# Altium PCB AICat V1.7 双面板 板厚1.6mm_lrd.PcbDoc (part 4 of 6)
Units mm, origin at the board's own origin, x right, y up, seen from the top; angles counter-clockwise.
Board outline 63.83 x 43.59 mm, 2 copper layers (Top Layer, Bottom Layer); 123 components, 84 nets, 332 pads, 255 vias.
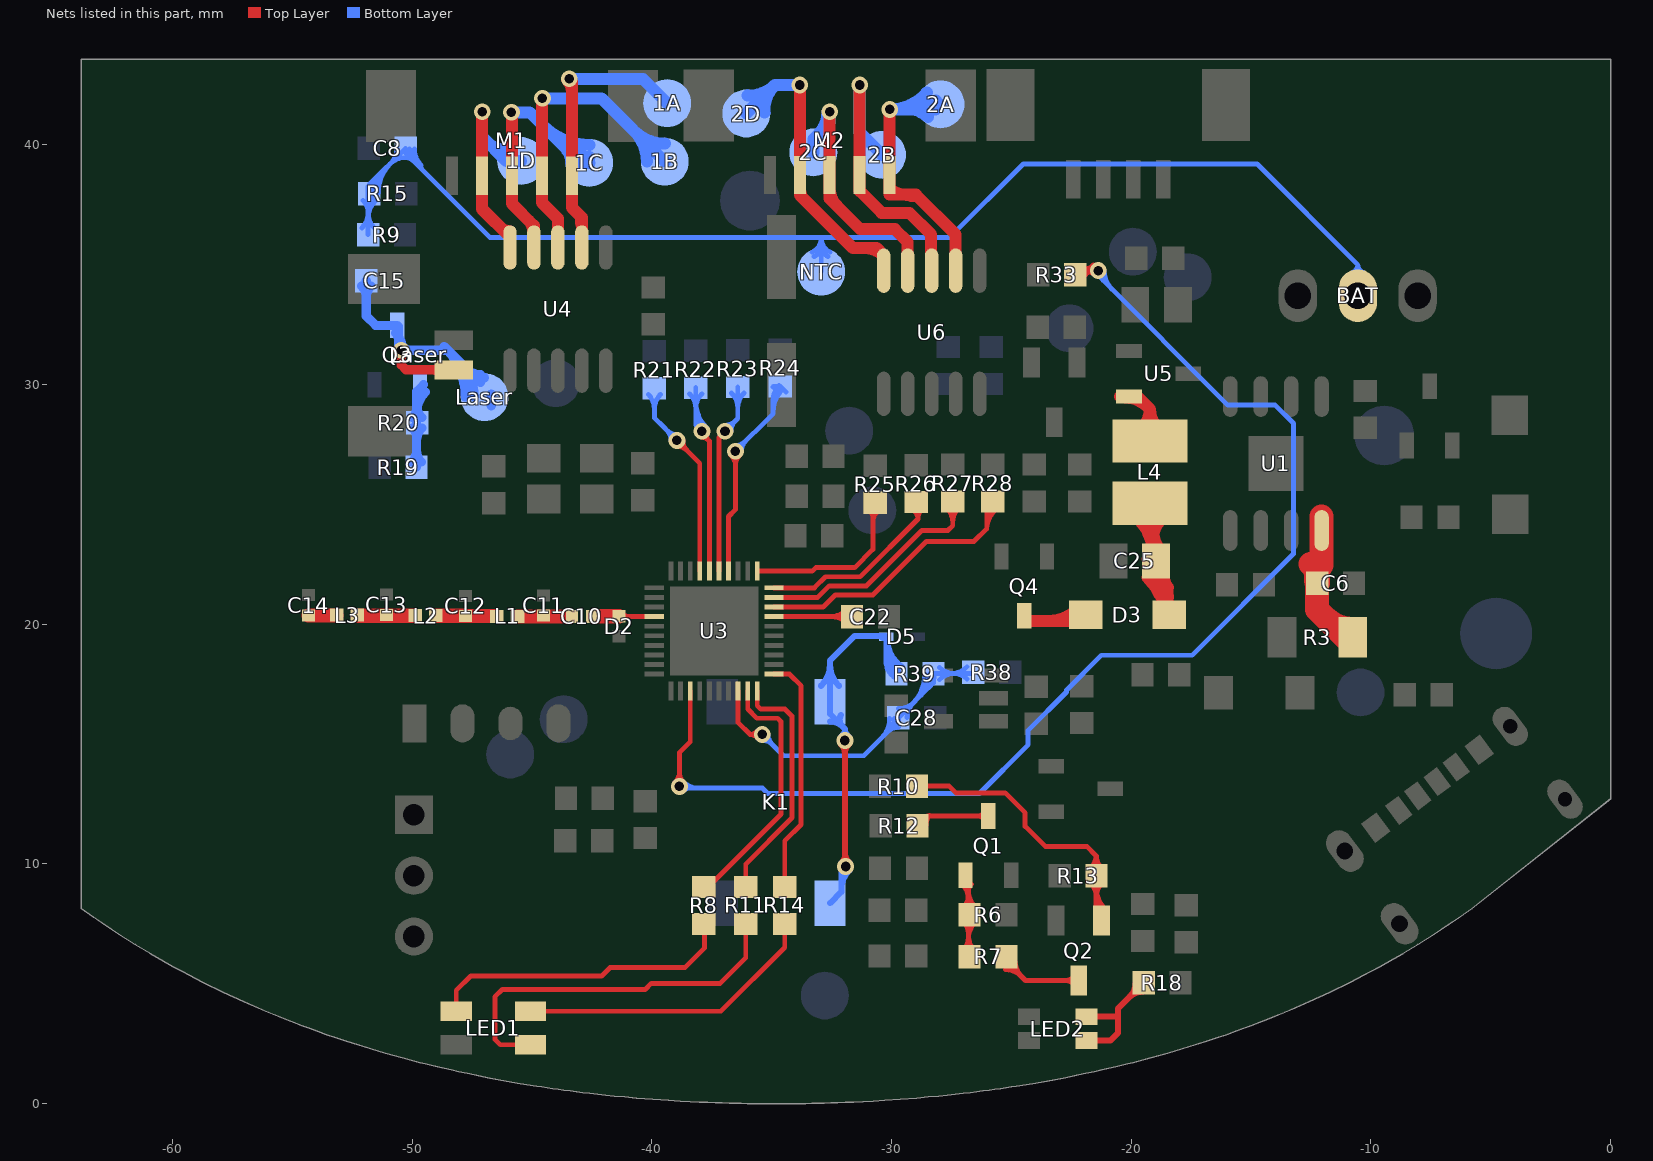
[diagram p4: the nets of this part, all layers, seen from the top]

## Via types
v1: diameter 0.7, hole 0.4, Top Layer to Bottom Layer, tented both sides, 255 vias

## Nets (pads, with @x,y where several pads share a name; then routed paths per layer and width w, separated by ;. In a path a pad name is that pad's centre, name@x,y a point inside that pad or via, vN(x,y) a via of type N, cw(c..) or ccw(c..) an arc to the next point about the centre after c; other vN are vias at no path point) (continued)
KEY: C28.2 R38.1 R39.2 U3.8 | length 42.4
  Top Layer w0.203: U3.8@-36.403,17.214 -36.403,15.893 -35.908,15.398 ; v1(-35.4,15.398) -35.908,15.398 ; -35.908,15.398 cw(c-35.908,15.003) v1@-35.596,15.245 ; -35.908,15.398 ccw(c-35.908,15.793) v1@-35.596,15.55 ; -35.908,15.398 ccw(c-35.908,15.793) v1@-35.596,15.55 ; -35.908,15.398 cw(c-35.908,15.003) v1@-35.596,15.245 ; -35.908,15.398 ccw(c-35.908,15.793) v1@-35.596,15.55 ; -35.908,15.398 cw(c-35.908,15.003) v1@-35.596,15.245
  Bottom Layer w0.203: v1(-35.4,15.398) -34.511,14.509 -31.159,14.509 -29.719,15.949 C28.2@-29.719,16.084 -28.255,17.548 R39.2@-28.255,17.938 -26.645,17.938 R38.1@-26.595,17.989 ; -30.417,15.251 ccw(c-31.225,16.059) C28.2@-30.082,16.059 ; -30.151,15.516 cw(c-29.719,15.084) C28.2@-29.719,15.695 ; C28.2@-30.07,15.598 ccw(c-30.531,16.059) C28.2@-29.879,16.059 ; v1@-35.4,15.15 cw(c-35.4,14.55) -34.976,14.974 ; v1@-35.4,15.15 cw(c-35.4,14.55) -34.976,14.974 ; v1@-35.4,15.15 cw(c-35.4,14.55) -34.976,14.974 ; v1@-35.152,15.398 ccw(c-34.552,15.398) -34.976,14.974 ; v1@-35.152,15.398 ccw(c-34.552,15.398) -34.976,14.974 ; v1@-35.152,15.398 ccw(c-34.552,15.398) -34.976,14.974 ; C28.2@-29.719,16.472 ccw(c-29.719,17.41) -29.056,16.747 ; C28.2@-29.719,16.472 ccw(c-29.719,17.41) -29.056,16.747 ; C28.2@-29.719,16.472 ccw(c-29.719,17.41) -29.056,16.747 ; C28.2@-29.355,16.109 cw(c-28.538,16.109) -29.116,16.686 ; C28.2@-29.355,16.109 cw(c-28.538,16.109) -29.116,16.686 ; C28.2@-29.355,16.109 cw(c-28.538,16.109) -29.116,16.686 ; -29.134,16.669 ccw(c-30.378,17.913) R39.2@-28.618,17.913 ; -29.134,16.669 ccw(c-30.378,17.913) R39.2@-28.618,17.913 ; -29.134,16.669 ccw(c-30.378,17.913) R39.2@-28.618,17.913 ; -28.787,17.016 ccw(c-29.684,17.913) R39.2@-28.415,17.913 ; -28.787,17.016 ccw(c-29.684,17.913) R39.2@-28.415,17.913 ; -28.787,17.016 ccw(c-29.684,17.913) R39.2@-28.415,17.913 ; -28.44,17.363 ccw(c-28.99,17.913) R39.2@-28.212,17.913 ; -28.44,17.363 ccw(c-28.99,17.913) R39.2@-28.212,17.913 ; -28.44,17.363 ccw(c-28.99,17.913) R39.2@-28.212,17.913 ; R39.2@-27.998,17.681 cw(c-27.378,17.061) -27.378,17.938 ; R39.2@-27.998,17.681 cw(c-27.378,17.061) -27.378,17.938 ; R39.2@-27.998,17.681 cw(c-27.378,17.061) -27.378,17.938 ; R39.2@-27.998,18.195 ccw(c-27.378,18.815) -27.378,17.938 ; R39.2@-27.998,18.195 ccw(c-27.378,18.815) -27.378,17.938 ; R39.2@-27.998,18.195 ccw(c-27.378,18.815) -27.378,17.938 ; -27.534,17.938 ccw(c-27.534,18.903) R38.1@-26.852,18.221 ; -27.534,17.938 ccw(c-27.534,18.903) R38.1@-26.852,18.221 ; -27.534,17.938 ccw(c-27.534,18.903) R38.1@-26.852,18.221 ; -27.41,17.938 cw(c-27.41,17.149) R38.1@-26.852,17.707 ; -27.41,17.938 cw(c-27.41,17.149) R38.1@-26.852,17.707 ; -27.41,17.938 cw(c-27.41,17.149) R38.1@-26.852,17.707 ; -30.176,15.492 cw(c-29.832,15.492) -29.999,15.792 ccw(c-29.832,15.492) -30.176,15.492
LED_B: R8.2 U3.9 | length 10.7
  Top Layer w0.203: R8.2@-37.839,9.031 -37.653,9.031 -34.613,12.071 -34.613,15.931 -34.754,16.072 -35.618,16.072 -36.003,16.458 U3.9@-36.003,17.214
LED_G: R11.2 U3.10 | length 10.1
  Top Layer w0.203: R11.2@-36.086,9.081 -36.086,9.988 -34.156,11.918 -34.156,16.16 -34.449,16.453 -35.46,16.453 -35.603,16.597 U3.10@-35.603,17.214
LED_R: R14.2 U3.11 | length 10
  Top Layer w0.203: U3.11@-34.904,17.914 -34.258,17.914 -33.775,17.43 -33.775,11.639 -34.461,10.953 R14.2@-34.461,9.081
LEIDA_CON: R33.2 U3.3 | length 77.5
  Top Layer w0.203: v1(-38.855,13.23) -38.855,14.636 -38.403,15.088 U3.3@-38.403,17.214 ; R33.2@-22.692,34.778 -22.667,34.804 v1@-21.405,34.804 ; R33.2@-22.102,34.804 cw(c-22.102,34.03) v1@-21.555,34.577 ; -21.857,34.804 ccw(c-21.857,35.23) v1@-21.555,34.928 ; v1@-21.456,34.753 v1@-21.405,34.804 ; v1@-39.03,13.405 ccw(c-39.455,13.829) -38.855,13.829 ; v1@-39.03,13.405 ccw(c-39.455,13.829) -38.855,13.829 ; v1@-39.03,13.405 ccw(c-39.455,13.829) -38.855,13.829 ; -38.855,13.829 ccw(c-38.255,13.829) v1@-38.679,13.405 ; -38.855,13.829 ccw(c-38.255,13.829) v1@-38.679,13.405 ; -38.855,13.829 ccw(c-38.255,13.829) v1@-38.679,13.405 ; R33.2@-22.439,34.502 cw(c-21.821,34.02) -21.821,34.804 ; R33.2@-22.439,34.502 cw(c-21.821,34.02) -21.821,34.804 ; R33.2@-22.439,34.502 cw(c-21.821,34.02) -21.821,34.804 ; R33.2@-22.279,34.377 cw(c-21.405,33.696) v1@-21.405,34.804 ; R33.2@-22.279,34.377 cw(c-21.405,33.696) v1@-21.405,34.804 ; R33.2@-22.279,34.377 cw(c-21.405,33.696) v1@-21.405,34.804 ; R33.2@-22.005,34.804 cw(c-22.005,34.204) v1@-21.581,34.628 ; R33.2@-22.005,34.804 ccw(c-22.005,35.403) v1@-21.581,34.979 ; R33.2@-22.005,34.804 cw(c-22.005,34.204) v1@-21.581,34.628 ; R33.2@-22.005,34.804 ccw(c-22.005,35.403) v1@-21.581,34.979 ; R33.2@-22.005,34.804 ccw(c-22.005,35.403) v1@-21.581,34.979 ; R33.2@-22.005,34.804 cw(c-22.005,34.204) v1@-21.581,34.628 ; R33.2@-22.005,34.804 ccw(c-22.005,35.403) v1@-21.581,34.979 ; R33.2@-22.005,34.804 cw(c-22.005,34.204) v1@-21.581,34.628 ; v1@-21.405,34.804 ccw(c-21.405,34.118) -22.014,34.433 cw(c-21.405,34.118) v1@-21.405,34.804 ; R33.2@-22.195,34.526 cw(c-21.739,34.291) -21.739,34.804 ccw(c-21.739,34.291) R33.2@-22.195,34.526
  Bottom Layer w0.203: v1(-38.855,13.23) -38.788,13.163 -35.392,13.163 -35.164,12.934 -26.333,12.934 -24.301,14.966 -24.301,15.568 -22.7,17.169 -22.7,17.245 -21.245,18.7 -17.46,18.7 -13.232,22.928 -13.232,28.377 -13.994,29.139 -15.969,29.139 -21.405,34.575 -21.405,34.804 v1@-21.456,34.753 ; v1@-21.334,34.753 ccw(c-20.735,34.753) -21.159,34.329 ; v1@-21.131,34.753 ccw(c-20.041,34.753) -20.812,33.982 ; v1@-38.679,13.054 cw(c-38.416,12.791) -38.416,13.163 ; v1@-38.679,13.054 cw(c-38.416,12.791) -38.416,13.163 ; v1@-38.679,13.054 cw(c-38.416,12.791) -38.416,13.163 ; v1@-38.679,13.405 ccw(c-38.094,13.991) -38.094,13.163 ; v1@-38.679,13.405 ccw(c-38.094,13.991) -38.094,13.163 ; v1@-38.679,13.405 ccw(c-38.094,13.991) -38.094,13.163 ; v1@-21.36,34.804 ccw(c-20.699,34.804) -21.166,34.336 ; v1@-21.36,34.804 ccw(c-20.699,34.804) -21.166,34.336 ; v1@-21.36,34.804 ccw(c-20.699,34.804) -21.166,34.336 ; v1@-21.36,34.804 ccw(c-20.699,34.804) -21.166,34.336 ; v1@-21.157,34.804 ccw(c-20.005,34.804) -20.819,33.989 ; v1@-21.157,34.804 ccw(c-20.005,34.804) -20.819,33.989 ; v1@-21.157,34.804 ccw(c-20.005,34.804) -20.819,33.989 ; v1@-21.157,34.804 ccw(c-20.005,34.804) -20.819,33.989
  other v1: -21.38,34.753
MOTORA_INA: R21.2 U3.27 | length 22.7
  Top Layer w0.203: v1(-38.956,27.666) -38.003,26.713 -38.003,22.789 ; U3.27@-38.003,22.213 -38.003,22.789 ; -38.003,23.158 -38.003,22.789 ; v1@-38.956,27.418 cw(c-38.956,26.818) -38.532,27.242 ; v1@-38.956,27.418 cw(c-38.956,26.818) -38.532,27.242 ; v1@-38.956,27.418 cw(c-38.956,26.818) -38.532,27.242 ; v1@-38.956,27.418 cw(c-38.956,26.818) -38.532,27.242 ; v1@-38.956,27.418 cw(c-38.956,26.818) -38.532,27.242 ; v1@-38.708,27.666 ccw(c-38.108,27.666) -38.532,27.242 ; v1@-38.708,27.666 ccw(c-38.108,27.666) -38.532,27.242 ; v1@-38.708,27.666 ccw(c-38.108,27.666) -38.532,27.242 ; v1@-38.708,27.666 ccw(c-38.108,27.666) -38.532,27.242 ; v1@-38.708,27.666 ccw(c-38.108,27.666) -38.532,27.242
  Bottom Layer w0.203: v1@-39.204,27.682 ccw(c-39.689,27.712) -39.346,28.055 ; v1@-38.972,27.914 cw(c-39.002,28.398) -39.346,28.055 ; v1(-38.956,27.666) -39.346,28.055 ; R21.2@-40.153,29.586 cw(c-40.774,28.965) -39.896,28.965 ; R21.2@-40.153,29.586 cw(c-40.774,28.965) -39.896,28.965 ; R21.2@-40.153,29.586 cw(c-40.774,28.965) -39.896,28.965 ; R21.2@-40.153,29.586 cw(c-40.774,28.965) -39.896,28.965 ; -39.896,28.965 cw(c-39.019,28.965) R21.2@-39.639,29.586 ; -39.896,28.965 cw(c-39.019,28.965) R21.2@-39.639,29.586 ; -39.896,28.965 cw(c-39.019,28.965) R21.2@-39.639,29.586 ; -39.896,28.965 cw(c-39.019,28.965) R21.2@-39.639,29.586 ; -39.896,28.965 -39.896,28.606 -39.515,28.225 -39.346,28.055 ; -39.38,28.09 cw(c-39.805,27.666) v1@-39.205,27.666 ; -39.38,28.09 ccw(c-38.956,28.514) v1@-38.956,27.915 ; -39.38,28.09 cw(c-39.805,27.666) v1@-39.205,27.666 ; -39.38,28.09 ccw(c-38.956,28.514) v1@-38.956,27.915 ; -39.38,28.09 ccw(c-38.956,28.514) v1@-38.956,27.915 ; -39.38,28.09 cw(c-39.805,27.666) v1@-39.205,27.666 ; -39.38,28.09 ccw(c-38.956,28.514) v1@-38.956,27.915 ; -39.38,28.09 cw(c-39.805,27.666) v1@-39.205,27.666
MOTORA_INB: R22.2 U3.26 | length 18.9
  Top Layer w0.203: v1@-38.017,28.047 -37.603,27.634 U3.26@-37.603,22.213 ; v1@-37.915,27.799 cw(c-37.915,27.444) -37.664,27.695 ; v1@-37.915,27.799 cw(c-37.915,27.444) -37.664,27.695 ; v1@-37.915,27.799 cw(c-37.915,27.444) -37.664,27.695 ; v1@-37.915,27.799 cw(c-37.915,27.444) -37.664,27.695 ; v1@-37.694,27.935 ccw(c-37.502,27.837) -37.654,27.685 ; v1@-37.694,27.935 ccw(c-37.502,27.837) -37.654,27.685 ; v1@-37.694,27.935 ccw(c-37.502,27.837) -37.654,27.685 ; v1@-37.694,27.935 ccw(c-37.502,27.837) -37.654,27.685
  Bottom Layer w0.203: -38.169,28.77 ccw(c-37.193,28.77) v1@-37.883,28.079 ; -38.169,29.26 ccw(c-36.702,29.26) v1@-37.739,28.223 ; R22.2@-38.169,29.868 -38.169,28.301 v1(-37.915,28.047) ; R22.2@-38.426,29.611 cw(c-39.046,28.991) -38.169,28.991 ; R22.2@-38.426,29.611 cw(c-39.046,28.991) -38.169,28.991 ; R22.2@-38.426,29.611 cw(c-39.046,28.991) -38.169,28.991 ; R22.2@-38.426,29.611 cw(c-39.046,28.991) -38.169,28.991 ; R22.2@-38.426,29.611 cw(c-39.046,28.991) -38.169,28.991 ; -38.169,28.991 cw(c-37.292,28.991) R22.2@-37.912,29.611 ; -38.169,28.991 cw(c-37.292,28.991) R22.2@-37.912,29.611 ; -38.169,28.991 cw(c-37.292,28.991) R22.2@-37.912,29.611 ; -38.169,28.991 cw(c-37.292,28.991) R22.2@-37.912,29.611 ; -38.169,28.991 cw(c-37.292,28.991) R22.2@-37.912,29.611
MOTORA_INC: R23.2 U3.25 | length 14.9
  Top Layer w0.203: U3.25@-37.203,22.213 -37.203,26.955 ; -37.203,27.26 -37.203,26.955 ; v1(-36.95,28.047) -37.203,27.794 -37.203,26.955
  Bottom Layer w0.203: v1(-36.95,28.047) -36.416,28.581 R23.2@-36.416,29.893 ; v1@-36.95,28.296 ccw(c-36.95,28.895) -36.526,28.471 ccw(c-36.102,28.047) v1@-36.701,28.047 ; R23.2@-36.673,29.636 cw(c-37.294,29.016) -36.416,29.016 cw(c-35.539,29.016) R23.2@-36.159,29.636 ; R23.2@-36.643,29.609 cw(c-37.017,29.139) -36.416,29.139 ; R23.2@-36.643,29.609 cw(c-37.017,29.139) -36.416,29.139 ; R23.2@-36.643,29.609 cw(c-37.017,29.139) -36.416,29.139 ; R23.2@-36.643,29.609 cw(c-37.017,29.139) -36.416,29.139 ; -36.416,29.139 cw(c-35.816,29.139) R23.2@-36.19,29.609 ; -36.416,29.139 cw(c-35.816,29.139) R23.2@-36.19,29.609 ; -36.416,29.139 cw(c-35.816,29.139) R23.2@-36.19,29.609 ; -36.416,29.139 cw(c-35.816,29.139) R23.2@-36.19,29.609
MOTORA_IND: R24.2 U3.24 | length 14
  Top Layer w0.203: U3.24@-36.803,22.213 -36.803,24.491 -36.518,24.776 -36.518,25.812 ; -36.518,26.295 -36.518,25.812 ; v1(-36.518,27.209) -36.518,25.812 ; -36.518,26.609 ccw(c-37.118,26.609) -36.694,27.033 cw(c-37.118,26.609) -36.518,26.609 ; -36.518,26.609 cw(c-35.918,26.609) -36.342,27.033 ccw(c-35.918,26.609) -36.518,26.609
  Bottom Layer w0.203: v1@-36.518,27.457 ccw(c-36.518,28.057) -36.094,27.633 ccw(c-35.67,27.209) v1@-36.27,27.209 ; -36.213,27.514 v1(-36.518,27.209) -34.943,28.784 -34.943,29.347 cw(c-34.092,29.347) R24.2@-34.694,29.949 ; -34.943,28.856 cw(c-33.601,28.856) R24.2@-34.55,29.805 ; R24.2@-34.943,29.901 -34.926,29.919 R24.2@-34.638,29.919 R24.2@-34.41,29.69
MOTORA_OUTA: 1A.1 M1.1 U4.7 | length 14.2
  Top Layer w0.381: U4.7@-43.02,35.812 U4.7@-42.923,35.715 ; -43.02,36.813 ccw(c-42.473,36.813) U4.7@-42.86,36.426 ; -43.02,36.813 ccw(c-42.473,36.813) U4.7@-42.86,36.426 ; -43.02,36.813 ccw(c-42.473,36.813) U4.7@-42.86,36.426
  Top Layer w0.5: v1(-43.452,42.754) -43.34,42.641 M1.1@-43.34,38.713 -43.34,37.384 -42.923,36.967 U4.7@-42.923,35.715 ; v1@-43.523,42.683 cw(c-43.965,42.241) -43.34,42.241 ccw(c-43.965,42.241) v1@-43.523,42.683
  Bottom Layer w0.5: v1(-43.452,42.754) -40.379,42.754 1A.1@-39.363,41.738
MOTORA_OUTB: 1B.1 M1.2 U4.8 | length 18.4
  Top Layer w0.5: v1@-44.59,41.916 M1.2@-44.59,38.713 -44.59,37.592 -43.923,36.926 U4.8@-43.923,35.715
  Bottom Layer w0.381: v1@-44.57,41.916 -44.595,41.916 v1(-44.57,41.941)
  Bottom Layer w0.5: v1(-44.57,41.941) -42.106,41.941 1B.1@-39.464,39.299 ; -40.745,40.58 ccw(c-39.464,41.86) -39.464,40.049 cw(c-39.464,41.86) -40.745,40.58 ; -40.745,40.58 cw(c-42.025,39.299) -40.214,39.299 ccw(c-42.025,39.299) -40.745,40.58
MOTORA_OUTC: 1C.1 M1.3 U4.9 | length 21.4
  Top Layer w0.381: -45.265,36.972 cw(c-45.876,36.362) U4.9@-45.013,36.362 ; -45.265,36.972 cw(c-45.876,36.362) U4.9@-45.013,36.362 ; -45.265,36.972 cw(c-45.876,36.362) U4.9@-45.013,36.362
  Top Layer w0.5: v1@-45.84,41.357 M1.3@-45.84,38.713 -45.84,37.547 -44.923,36.63 U4.9@-44.923,35.715 ; -45.164,36.871 cw(c-45.672,36.362) -44.953,36.362 ccw(c-45.672,36.362) -45.164,36.871
  Bottom Layer w0.381: v1(-45.865,41.357) v1@-45.682,41.357
  Bottom Layer w0.5: v1@-45.682,41.357 -45.103,41.357 -42.995,39.249 1C.1@-42.614,39.249 ; -44.545,40.798 ccw(c-42.614,42.729) -42.614,39.999 cw(c-42.614,42.729) -44.545,40.798 ; -43.691,39.945 ccw(c-42.614,41.022) -42.614,39.499 cw(c-42.614,41.022) -43.691,39.945 ; -43.625,39.878 cw(c-44.255,39.249) -43.364,39.249 ccw(c-44.255,39.249) -43.625,39.878
MOTORA_OUTD: 1D.1 M1.4 U4.10 | length 15.9
  Top Layer w0.203: -47.166,37.806 M1.4@-47.166,38.535 ; -47.166,37.798 cw(c-46.906,37.798) M1.4@-47.023,38.031 ; -47.166,37.798 cw(c-46.906,37.798) M1.4@-47.023,38.031 ; -47.166,37.798 cw(c-46.906,37.798) M1.4@-47.023,38.031 ; -47.166,37.798 cw(c-46.906,37.798) M1.4@-47.023,38.031 ; -47.166,37.798 cw(c-46.906,37.798) M1.4@-47.023,38.031
  Top Layer w0.381: -46.427,36.66 ccw(c-45.923,37.164) U4.10@-45.923,36.452 ; -46.427,36.66 ccw(c-45.923,37.164) U4.10@-45.923,36.452 ; -46.427,36.66 ccw(c-45.923,37.164) U4.10@-45.923,36.452
  Top Layer w0.5: v1@-47.09,41.382 M1.4@-47.09,38.713 -47.09,37.324 -45.923,36.157 U4.10@-45.923,35.715 ; -46.325,36.559 ccw(c-45.923,36.96) -45.923,36.392 cw(c-45.923,36.96) -46.325,36.559
  Bottom Layer w0.5: v1(-47.084,41.382) -47.084,40.341 -46.068,39.325 1D.1@-45.459,39.325 ; -46.78,40.036 ccw(c-46.274,40.541) -45.876,39.948 cw(c-46.274,40.541) -46.78,40.036
MOTORB_INA: R25.2 U3.21 | length 12.6
  Top Layer w0.203: U3.21@-35.603,22.213 -33.31,22.213 -33.165,22.358 -31.54,22.358 -30.778,23.12 -30.778,24.259 ; -30.779,24.261 -30.778,24.263 -30.778,24.966 R25.2@-30.676,25.067 ; R25.2@-30.958,24.81 cw(c-31.393,24.375) -30.778,24.375 ; R25.2@-30.958,24.81 cw(c-31.393,24.375) -30.778,24.375 ; R25.2@-30.958,24.81 cw(c-31.393,24.375) -30.778,24.375 ; R25.2@-30.958,24.81 cw(c-31.393,24.375) -30.778,24.375 ; R25.2@-30.958,24.81 cw(c-31.393,24.375) -30.778,24.375 ; -30.778,24.259 cw(c-30.178,24.259) R25.2@-30.504,24.762 ; -30.778,24.259 cw(c-30.178,24.259) R25.2@-30.504,24.762 ; -30.778,24.259 cw(c-30.178,24.259) R25.2@-30.504,24.762 ; -30.778,24.259 cw(c-30.178,24.259) R25.2@-30.504,24.762 ; -30.778,24.259 cw(c-30.178,24.259) R25.2@-30.504,24.762
MOTORB_INB: R26.2 U3.20 | length 12.7
  Top Layer w0.203: U3.20@-34.904,21.514 -34.085,21.514 -33.222,21.514 -32.759,21.977 -31.311,21.977 -28.9,24.388 ; R26.2@-28.974,25.093 -28.898,25.017 -28.898,24.39 -28.9,24.388 ; R26.2@-29.126,24.775 cw(c-29.341,24.388) -28.898,24.388 ; R26.2@-29.126,24.775 cw(c-29.341,24.388) -28.898,24.388 ; R26.2@-29.126,24.775 cw(c-29.341,24.388) -28.898,24.388 ; R26.2@-29.126,24.775 cw(c-29.341,24.388) -28.898,24.388 ; R26.2@-29.126,24.775 cw(c-29.341,24.388) -28.898,24.388 ; -28.9,24.388 -28.898,24.388 ; -28.898,24.388 cw(c-28.309,24.388) R26.2@-28.705,24.824 ; -28.898,24.388 cw(c-28.309,24.388) R26.2@-28.705,24.824 ; -28.898,24.388 cw(c-28.309,24.388) R26.2@-28.705,24.824 ; -28.898,24.388 cw(c-28.309,24.388) R26.2@-28.705,24.824 ; -28.898,24.388 cw(c-28.309,24.388) R26.2@-28.705,24.824
MOTORB_INC: R27.2 U3.19 | length 16.6
  Top Layer w0.203: U3.19@-34.904,21.114 -33.723,21.114 -33.083,21.114 -32.601,21.596 -31.045,21.596 -28.734,23.907 -27.653,23.907 -27.45,24.11 R27.2@-27.45,25.118 ; R27.2@-27.707,24.861 cw(c-28.328,24.241) -27.45,24.241 ; R27.2@-27.707,24.861 cw(c-28.328,24.241) -27.45,24.241 ; R27.2@-27.707,24.861 cw(c-28.328,24.241) -27.45,24.241 ; R27.2@-27.707,24.861 cw(c-28.328,24.241) -27.45,24.241 ; R27.2@-27.707,24.861 cw(c-28.328,24.241) -27.45,24.241 ; -27.45,24.241 cw(c-26.573,24.241) R27.2@-27.193,24.861 ; -27.45,24.241 cw(c-26.573,24.241) R27.2@-27.193,24.861 ; -27.45,24.241 cw(c-26.573,24.241) R27.2@-27.193,24.861 ; -27.45,24.241 cw(c-26.573,24.241) R27.2@-27.193,24.861 ; -27.45,24.241 cw(c-26.573,24.241) R27.2@-27.193,24.861
MOTORB_IND: R28.2 U3.18 | length 20.1
  Top Layer w0.203: U3.18@-34.904,20.714 -33.361,20.714 -32.853,20.714 -32.352,21.215 -30.78,21.215 -28.545,23.45 -26.561,23.45 -26.03,23.981 R28.2@-26.03,25.137 ; -26.03,23.957 cw(c-24.964,23.957) R28.2@-25.587,24.823 ; -26.03,23.957 cw(c-24.964,23.957) R28.2@-25.587,24.823 ; -26.03,23.957 cw(c-24.964,23.957) R28.2@-25.587,24.823 ; -26.03,23.957 cw(c-24.964,23.957) R28.2@-25.587,24.823 ; -26.03,23.957 cw(c-24.964,23.957) R28.2@-25.587,24.823 ; -26.03,24.354 cw(c-25.249,24.354) R28.2@-25.705,24.988 ; -26.03,24.354 cw(c-25.249,24.354) R28.2@-25.705,24.988 ; -26.03,24.354 cw(c-25.249,24.354) R28.2@-25.705,24.988 ; -26.03,24.354 cw(c-25.249,24.354) R28.2@-25.705,24.988 ; -26.03,24.354 cw(c-25.249,24.354) R28.2@-25.705,24.988
MOTORB_OUTA: 2A.1 M2.1 U6.7 | length 22.8
  Top Layer w0.381: v1@-30.092,41.488 v1(-30.081,41.477) ; M2.1@-30.081,38.738 M2.1@-30.081,38.815 ; M2.1@-30.039,38.23 ccw(c-29.002,39.268) -29.002,37.801 ; M2.1@-30.039,38.23 ccw(c-29.002,39.268) -29.002,37.801 ; M2.1@-30.039,38.23 ccw(c-29.002,39.268) -29.002,37.801
  Top Layer w0.5: v1(-30.081,41.477) M2.1@-30.081,38.738 -30.081,37.917 -28.989,37.917 -27.328,36.256 U6.7@-27.328,34.75 ; M2.1@-30.081,38.188 ccw(c-29.426,38.844) -29.426,37.917 cw(c-29.426,38.844) M2.1@-30.081,38.188
  Bottom Layer w0.5: v1(-30.081,41.477) -28.168,41.477 2A.1@-27.958,41.687 ; v1(-30.081,41.477) ccw(c-30.081,43.553) -28.521,42.182 cw(c-30.081,43.553) v1(-30.081,41.477) ; -29.261,41.477 cw(c-29.261,40.384) -28.489,41.157 ccw(c-29.261,40.384) -29.261,41.477 ; -28.976,41.477 ccw(c-28.976,42.581) -28.146,41.852 cw(c-28.976,42.581) -28.976,41.477
MOTORB_OUTB: 2B.1 M2.2 U6.8 | length 13.1
  Top Layer w0.381: v1@-31.336,42.5 v1(-31.331,42.494) ; M2.2@-31.331,38.738 M2.2@-31.331,38.815
  Top Layer w0.5: v1(-31.331,42.494) M2.2@-31.331,38.738 -31.331,38.077 -30.414,37.16 -29.267,37.16 -29.262,37.164 -28.353,36.255 -28.353,34.775 U6.8@-28.328,34.75
  Bottom Layer w0.5: v1(-31.331,42.494) -31.331,40.513 2B.1@-30.397,39.579
MOTORB_OUTC: 2C.1 M2.3 U6.9 | length 16.3
  Top Layer w0.381: M2.3@-32.581,38.738 M2.3@-32.581,38.815
  Top Layer w0.5: v1(-32.581,41.382) M2.3@-32.581,38.738 -32.581,37.75 -31.313,36.482 -29.865,36.482 -29.328,35.944 U6.9@-29.328,34.75 ; M2.3@-32.581,38.188 ccw(c-31.522,38.188) -32.271,37.44 cw(c-31.522,38.188) M2.3@-32.581,38.188
  Bottom Layer w0.5: 2C.1@-33.267,39.68 -33.267,40.239 -32.581,40.925 ; v1(-32.581,41.382) -32.581,40.925 ; -32.581,40.925 ccw(c-32.131,40.475) -32.652,40.11 cw(c-32.131,40.475) -32.581,40.925 ; 2C.1@-33.038,40.468 ccw(c-33.903,41.333) -32.681,41.378 cw(c-33.903,41.333) 2C.1@-33.038,40.468
MOTORB_OUTD: 2D.1 M2.4 U6.10 | length 20.9
  Top Layer w0.381: M2.4@-33.831,38.253 M2.4@-33.831,38.738 M2.4@-33.831,38.815 ; v1(-33.831,42.494) v1@-33.826,42.5
  Top Layer w0.5: v1(-33.831,42.494) M2.4@-33.831,38.738 -33.831,38.253 -33.831,37.908 -31.616,35.693 -30.625,35.693 -30.328,35.395 U6.10@-30.328,34.75 ; M2.4@-33.831,38.188 ccw(c-33.154,38.188) -33.633,37.709 cw(c-33.154,38.188) M2.4@-33.831,38.188 ; -31.113,35.693 cw(c-31.113,34.611) -30.349,35.376 ccw(c-31.113,34.611) -31.113,35.693
  Bottom Layer w0.5: 2D.1@-36.061,41.306 -34.872,42.494 ; v1(-33.831,42.494) -34.872,42.494 ; -34.873,42.494 ccw(c-33.806,41.428) -35.312,41.347 cw(c-33.806,41.428) -34.873,42.494 ; -34.873,42.494 cw(c-35.939,43.56) -36.02,42.055 ccw(c-35.939,43.56) -34.873,42.494
NetANT1_1: C14.2 L3.2 | length 1.2
  Top Layer w0.589: C14.2@-54.331,20.364 L3.2@-53.17,20.364
NetBAT1_2: BAT.2 C8.1 NTC.1 R9.1 R15.2 | length 98.3
  Bottom Layer w0.203: R9.1@-51.842,36.251 -51.842,38.259 R15.2@-51.817,38.285 ; R15.2@-51.791,37.953 -51.791,38.344 C8.1@-50.277,39.858 -50.277,39.647 -46.766,36.136 -32.962,36.136 ; -49.728,39.242 ccw(c-50.277,38.693) C8.1@-50.277,39.47 ; -49.627,39.141 cw(c-48.935,39.833) C8.1@-49.913,39.833 ; NTC.1@-32.937,34.702 -32.937,36.111 ; BAT.2@-10.741,34.326 ccw(c-10.823,34.588) -10.547,34.588 ccw(c-10.272,34.588) BAT.2@-10.354,34.326 ; BAT.2@-10.547,33.707 -10.547,34.995 ; R9.1@-52.099,36.533 ccw(c-52.72,37.154) -51.842,37.154 ; R9.1@-52.099,36.533 ccw(c-52.72,37.154) -51.842,37.154 ; R9.1@-52.099,36.533 ccw(c-52.72,37.154) -51.842,37.154 ; R9.1@-52.099,36.533 ccw(c-52.72,37.154) -51.842,37.154 ; R9.1@-52.099,36.533 ccw(c-52.72,37.154) -51.842,37.154 ; R15.2@-52.048,37.671 cw(c-52.546,37.173) -51.842,37.173 ; R15.2@-52.048,37.671 cw(c-52.546,37.173) -51.842,37.173 ; R15.2@-52.048,37.671 cw(c-52.546,37.173) -51.842,37.173 ; R15.2@-52.048,37.671 cw(c-52.546,37.173) -51.842,37.173 ; R15.2@-52.048,37.671 cw(c-52.546,37.173) -51.842,37.173 ; -51.842,36.928 cw(c-50.792,36.928) R15.2@-51.534,37.671 ; -51.842,36.928 cw(c-50.792,36.928) R15.2@-51.534,37.671 ; -51.842,36.928 cw(c-50.792,36.928) R15.2@-51.534,37.671 ; -51.842,36.928 cw(c-50.792,36.928) R15.2@-51.534,37.671 ; -51.842,36.928 cw(c-50.792,36.928) R15.2@-51.534,37.671 ; -51.842,37.154 ccw(c-50.965,37.154) R9.1@-51.585,36.533 ; -51.842,37.154 ccw(c-50.965,37.154) R9.1@-51.585,36.533 ; -51.842,37.154 ccw(c-50.965,37.154) R9.1@-51.585,36.533 ; -51.842,37.154 ccw(c-50.965,37.154) R9.1@-51.585,36.533 ; -51.842,37.154 ccw(c-50.965,37.154) R9.1@-51.585,36.533 ; -51.842,37.419 cw(c-51.282,37.419) R15.2@-51.678,37.815 ; -51.842,37.419 cw(c-51.282,37.419) R15.2@-51.678,37.815 ; -51.842,37.419 cw(c-51.282,37.419) R15.2@-51.678,37.815 ; -51.842,37.419 cw(c-51.282,37.419) R15.2@-51.678,37.815 ; -51.842,37.419 cw(c-51.282,37.419) R15.2@-51.678,37.815 ; R15.2@-51.834,37.978 cw(c-51.056,37.978) -51.607,38.528 ; R15.2@-51.834,37.978 cw(c-51.056,37.978) -51.607,38.528 ; R15.2@-51.834,37.978 cw(c-51.056,37.978) -51.607,38.528 ; R15.2@-51.834,37.978 cw(c-51.056,37.978) -51.607,38.528 ; R15.2@-51.631,37.978 cw(c-50.362,37.978) -51.26,38.875 ; R15.2@-51.631,37.978 cw(c-50.362,37.978) -51.26,38.875 ; R15.2@-51.631,37.978 cw(c-50.362,37.978) -51.26,38.875 ; R15.2@-51.631,37.978 cw(c-50.362,37.978) -51.26,38.875 ; R15.2@-51.428,37.978 cw(c-49.669,37.978) -50.913,39.222 ; R15.2@-51.428,37.978 cw(c-49.669,37.978) -50.913,39.222 ; R15.2@-51.428,37.978 cw(c-49.669,37.978) -50.913,39.222 ; R15.2@-51.428,37.978 cw(c-49.669,37.978) -50.913,39.222 ; -50.94,39.195 cw(c-50.277,38.532) C8.1@-50.277,39.47 ; -50.94,39.195 cw(c-50.277,38.532) C8.1@-50.277,39.47 ; -50.94,39.195 cw(c-50.277,38.532) C8.1@-50.277,39.47 ; -50.94,39.195 cw(c-50.277,38.532) C8.1@-50.277,39.47 ; -50.879,39.255 ccw(c-51.457,39.833) C8.1@-50.64,39.833 ; -50.879,39.255 ccw(c-51.457,39.833) C8.1@-50.64,39.833 ; -50.879,39.255 ccw(c-51.457,39.833) C8.1@-50.64,39.833 ; -50.879,39.255 ccw(c-51.457,39.833) C8.1@-50.64,39.833 ; C8.1@-50.277,39.47 cw(c-50.277,39.042) -49.974,39.344 ccw(c-50.277,39.042) C8.1@-50.277,39.47 ; C8.1@-49.913,39.833 ccw(c-48.586,39.833) -49.525,38.895 cw(c-48.586,39.833) C8.1@-49.913,39.833 ; -32.962,36.136 -32.937,36.111 ; -32.962,36.136 -27.565,36.136 -24.504,39.198 -14.75,39.198 -10.547,34.995 ; -32.937,35.792 ccw(c-32.429,35.792) -32.643,35.332 cw(c-32.429,35.792) -32.937,35.792 ; -32.937,35.792 cw(c-33.444,35.792) -33.23,35.332 ccw(c-33.444,35.792) -32.937,35.792 ; -32.937,36.111 ccw(c-32.281,36.111) -32.558,35.517 cw(c-32.281,36.111) -32.937,36.111 ; -32.937,36.111 cw(c-33.592,36.111) -33.316,35.517 ccw(c-33.592,36.111) -32.937,36.111 ; -10.547,34.995 ccw(c-10.197,34.995) -10.314,34.665 cw(c-10.197,34.995) -10.547,34.995 ; -10.547,34.995 cw(c-10.897,34.995) -10.78,34.665 ccw(c-10.897,34.995) -10.547,34.995 ; C8.1@-50.117,39.833 ccw(c-49.28,39.833) -49.872,39.242 cw(c-49.28,39.833) C8.1@-50.117,39.833
NetC6_2: C6.2 R3.1 U1.4 | length 20.4
  Top Layer w1: U1.4@-12.058,23.094 U1.4@-12.058,23.907 ; U1.4@-12.058,24.491 U1.4@-12.058,23.907 ; R3.1@-11.329,19.692 -11.087,19.45 -12.244,20.606 C6.2@-12.244,21.697 -12.244,22.239 -12.261,22.256 -12.058,22.459 ; -12.519,22.514 cw(c-13.271,21.762) C6.2@-12.209,21.721 ; -12.519,22.514 cw(c-13.271,21.762) C6.2@-12.209,21.721 ; -12.519,22.514 cw(c-13.271,21.762) C6.2@-12.209,21.721 ; -12.519,22.514 cw(c-13.271,21.762) C6.2@-12.209,21.721 ; -12.519,22.514 cw(c-13.271,21.762) C6.2@-12.209,21.721 ; C6.2@-12.278,21.715 cw(c-11.483,21.885) -12.058,22.459 ; C6.2@-12.278,21.715 cw(c-11.483,21.885) -12.058,22.459 ; C6.2@-12.278,21.715 cw(c-11.483,21.885) -12.058,22.459 ; C6.2@-12.278,21.715 cw(c-11.483,21.885) -12.058,22.459 ; C6.2@-12.278,21.715 cw(c-11.483,21.885) -12.058,22.459 ; -12.058,22.459 U1.4@-12.058,23.907 ; -11.919,20.282 ccw(c-10.757,21.444) R3.1@-10.757,19.8 ; -11.919,20.282 ccw(c-10.757,21.444) R3.1@-10.757,19.8 ; -11.919,20.282 ccw(c-10.757,21.444) R3.1@-10.757,19.8 ; -11.685,20.048 ccw(c-11.087,20.646) -11.087,19.8 cw(c-11.087,20.646) -11.685,20.048
NetC10_1: C10.1 D2.1 U3.34 | length 5.4
  Top Layer w0.203: D2.1@-41.373,20.327 -41.36,20.314 U3.34@-39.903,20.314 ; D2.1@-41.244,20.22 cw(c-41.018,19.994) -41.018,20.314 ; D2.1@-41.244,20.22 cw(c-41.018,19.994) -41.018,20.314 ; D2.1@-41.244,20.22 cw(c-41.018,19.994) -41.018,20.314 ; D2.1@-41.244,20.22 cw(c-41.018,19.994) -41.018,20.314 ; D2.1@-41.244,20.22 cw(c-41.018,19.994) -41.018,20.314 ; D2.1@-41.244,20.434 ccw(c-40.954,20.723) -40.954,20.314 ; D2.1@-41.244,20.434 ccw(c-40.954,20.723) -40.954,20.314 ; D2.1@-41.244,20.434 ccw(c-40.954,20.723) -40.954,20.314 ; D2.1@-41.244,20.434 ccw(c-40.954,20.723) -40.954,20.314 ; D2.1@-41.244,20.434 ccw(c-40.954,20.723) -40.954,20.314
  Top Layer w0.589: C10.1@-42.448,20.327 D2.1@-41.373,20.327
NetC10_2: C10.2 C11.2 L1.1 | length 2.2
  Top Layer w0.5: C11.2@-44.551,20.326 C11.2@-44.519,20.358
  Top Layer w0.589: L1.1@-45.585,20.326 C10.2@-43.389,20.326
NetC12_2: C12.2 L1.2 L2.1 | length 2.5
  Top Layer w0.589: L2.1@-49.004,20.351 C12.2@-47.789,20.351 ; C12.2@-47.77,20.332 L1.2@-46.501,20.332
NetC13_2: C13.2 L2.2 L3.1 | length 2.4
  Top Layer w0.5: C13.2@-51.079,20.376 C13.2@-51.072,20.383
  Top Layer w0.589: L3.1@-52.273,20.351 L2.2@-49.897,20.351
NetC15_1: C15.1 Laser.1@-46.983,29.47 Laser.2 Q3.3 | length 34.8
  Top Layer w0.381: v1(-50.463,31.425) -50.463,30.816 -50.259,30.613 -48.291,30.613 Laser.2@-48.276,30.597 ; v1@-50.575,31.313 cw(c-50.848,31.04) -50.463,31.04 ; v1@-50.575,31.313 cw(c-50.848,31.04) -50.463,31.04 ; v1@-50.575,31.313 cw(c-50.848,31.04) -50.463,31.04 ; v1@-50.575,31.313 cw(c-50.848,31.04) -50.463,31.04 ; v1@-50.575,31.313 cw(c-50.848,31.04) -50.463,31.04 ; -50.463,31.04 cw(c-50.078,31.04) v1@-50.35,31.313 ; -50.463,31.04 cw(c-50.078,31.04) v1@-50.35,31.313 ; -50.463,31.04 cw(c-50.078,31.04) v1@-50.35,31.313 ; -50.463,31.04 cw(c-50.078,31.04) v1@-50.35,31.313 ; -50.463,31.04 cw(c-50.078,31.04) v1@-50.35,31.313 ; -49.219,30.613 cw(c-49.219,30.054) Laser.2@-48.824,30.449 ; -49.219,30.613 cw(c-49.219,30.054) Laser.2@-48.824,30.449 ; -49.219,30.613 cw(c-49.219,30.054) Laser.2@-48.824,30.449 ; -49.219,30.613 cw(c-49.219,30.054) Laser.2@-48.824,30.449 ; -49.219,30.613 cw(c-49.219,30.054) Laser.2@-48.824,30.449 ; -49.145,30.613 ccw(c-49.145,31.066) Laser.2@-48.824,30.745 ; -49.145,30.613 ccw(c-49.145,31.066) Laser.2@-48.824,30.745 ; -49.145,30.613 ccw(c-49.145,31.066) Laser.2@-48.824,30.745 ; -49.145,30.613 ccw(c-49.145,31.066) Laser.2@-48.824,30.745 ; -49.145,30.613 ccw(c-49.145,31.066) Laser.2@-48.824,30.745
  Bottom Layer w0.381: C15.1@-51.918,34.321 -51.918,32.856 -51.528,32.465 Q3.3@-50.627,32.465 -50.575,32.413 v1@-50.575,31.538 ; Q3.3@-50.705,32.153 cw(c-51.017,31.841) -50.575,31.841 ; Q3.3@-50.575,32.083 ccw(c-49.805,32.083) v1@-50.35,31.538 ; v1(-50.463,31.425) -48.507,31.425 Laser.1@-47.161,30.079 ; -48.67,31.589 cw(c-50.789,29.47) Laser.1@-47.792,29.47 ; -48.143,31.061 cw(c-49.486,29.717) Laser.1@-47.589,29.619 ; -48.02,30.938 cw(c-49.488,29.47) Laser.1@-47.411,29.47 ; -47.719,30.637 ccw(c-47.161,31.195) Laser.1@-47.161,30.406 ; -47.628,30.546 ccw(c-46.983,31.191) Laser.1@-46.983,30.279 ; Laser.1@-46.703,29.114 Laser.1@-46.703,29.597 ; C15.1@-52.113,34.102 cw(c-52.581,33.633) -51.918,33.633 ; C15.1@-52.113,34.102 cw(c-52.581,33.633) -51.918,33.633 ; C15.1@-52.113,34.102 cw(c-52.581,33.633) -51.918,33.633 ; C15.1@-52.113,34.102 cw(c-52.581,33.633) -51.918,33.633 ; C15.1@-52.113,34.102 cw(c-52.581,33.633) -51.918,33.633 ; -51.918,33.633 cw(c-51.256,33.633) C15.1@-51.724,34.102 ; -51.918,33.633 cw(c-51.256,33.633) C15.1@-51.724,34.102 ; -51.918,33.633 cw(c-51.256,33.633) C15.1@-51.724,34.102 ; -51.918,33.633 cw(c-51.256,33.633) C15.1@-51.724,34.102 ; -51.918,33.633 cw(c-51.256,33.633) C15.1@-51.724,34.102 ; v1@-50.575,31.538 ccw(c-50.848,31.81) -50.463,31.81 ; v1@-50.575,31.538 ccw(c-50.848,31.81) -50.463,31.81 ; v1@-50.575,31.538 ccw(c-50.848,31.81) -50.463,31.81 ; v1@-50.575,31.538 ccw(c-50.848,31.81) -50.463,31.81 ; -50.463,31.81 ccw(c-50.078,31.81) v1@-50.35,31.538 ; -50.463,31.81 ccw(c-50.078,31.81) v1@-50.35,31.538 ; -50.463,31.81 ccw(c-50.078,31.81) v1@-50.35,31.538 ; -50.463,31.81 ccw(c-50.078,31.81) v1@-50.35,31.538 ; v1@-50.35,31.538 ccw(c-50.078,31.81) -50.078,31.425 ; v1@-50.35,31.538 ccw(c-50.078,31.81) -50.078,31.425 ; -50.078,31.425 ccw(c-50.078,31.04) -50.35,31.313 cw(c-50.078,31.04) -50.078,31.425
NetC22_2: C22.2 U3.17 | length 7.7
  Top Layer w0.203: U3.17@-34.904,20.314 -31.686,20.314 C22.2@-31.446,20.554 ; -32.402,20.314 ccw(c-32.402,21.23) C22.2@-31.754,20.582 ; -32.346,20.314 cw(c-32.346,19.476) C22.2@-31.754,20.068 ; -32.554,20.314 ccw(c-32.554,21.23) -31.906,20.582 cw(c-32.554,21.23) -32.554,20.314 ; -32.499,20.314 cw(c-32.499,19.476) -31.906,20.068 ccw(c-32.499,19.476) -32.499,20.314
NetC25_1: C25.1 D3.2 L4.1 | length 28.7
  Top Layer w0.508: L4.1@-19.677,24.357 cw(c-21.089,22.945) C25.1@-19.093,22.945 ; C25.1@-19.323,21.947 cw(c-21.376,19.894) D3.2@-18.516,20.394 ; C25.1@-19.323,22.718 ccw(c-19.88,23.274) -19.093,23.274 ccw(c-18.306,23.274) C25.1@-18.862,22.718 ; -19.093,21.851 cw(c-19.093,21.119) -18.575,21.637 ; -19.093,23.563 cw(c-17.97,23.563) L4.1@-18.764,24.357 ; L4.1@-19.068,24.814 -19.093,24.789 -19.093,22.154 -18.473,21.535 ; C25.1@-18.964,22.306 cw(c-20.15,21.12) -18.473,21.12 ; C25.1@-18.767,22.177 ccw(c-17.925,22.177) -18.52,21.582 ; D3.2@-18.741,20.279 ccw(c-19.389,20.927) D3.2@-18.473,20.927 ; D3.2@-18.473,20.812 ccw(c-17.719,20.812) D3.2@-18.252,20.279 ; L4.1@-19.677,24.586 cw(c-21.089,23.174) C25.1@-19.093,23.174 ; L4.1@-19.677,24.586 cw(c-21.089,23.174) C25.1@-19.093,23.174 ; L4.1@-19.677,24.586 cw(c-21.089,23.174) C25.1@-19.093,23.174 ; L4.1@-19.677,24.586 cw(c-21.089,23.174) C25.1@-19.093,23.174 ; -19.093,23.792 cw(c-17.97,23.792) L4.1@-18.764,24.586 ; -19.093,23.792 cw(c-17.97,23.792) L4.1@-18.764,24.586 ; -19.093,23.792 cw(c-17.97,23.792) L4.1@-18.764,24.586 ; -19.093,23.792 cw(c-17.97,23.792) L4.1@-18.764,24.586 ; -19.093,23.886 ccw(c-17.872,23.886) C25.1@-18.735,23.022 ; -19.093,23.886 ccw(c-17.872,23.886) C25.1@-18.735,23.022 ; -19.093,23.886 ccw(c-17.872,23.886) C25.1@-18.735,23.022 ; -19.093,23.886 ccw(c-17.872,23.886) C25.1@-18.735,23.022 ; C25.1@-18.719,22.269 ccw(c-18.437,22.025) -18.7,21.762 ; C25.1@-18.719,22.269 ccw(c-18.437,22.025) -18.7,21.762 ; C25.1@-18.719,22.269 ccw(c-18.437,22.025) -18.7,21.762 ; C25.1@-18.719,22.269 ccw(c-18.437,22.025) -18.7,21.762
NetD3_1: D3.1 Q4.3 | length 8.5
  Top Layer w0.508: Q4.3@-24.338,20.124 D3.1@-21.702,20.124 ; D3.1@-22.586,20.124 ccw(c-22.586,20.653) D3.1@-22.211,20.279 ; -23.469,20.124 ccw(c-23.469,21.867) D3.1@-22.237,20.635 ; -23.469,20.124 ccw(c-23.469,21.867) D3.1@-22.237,20.635 ; -23.469,20.124 ccw(c-23.469,21.867) D3.1@-22.237,20.635 ; -23.469,20.124 ccw(c-23.469,21.867) D3.1@-22.237,20.635
NetD5_1: D5.1 K1.3 K1.4 R39.1 | length 43.1
  Top Layer w0.254: v1(-31.946,15.144) -31.946,9.962 v1@-31.921,9.937 ; v1@-32.104,14.986 cw(c-32.484,14.606) -31.946,14.606 ; v1@-32.104,14.986 cw(c-32.484,14.606) -31.946,14.606 ; v1@-32.104,14.986 cw(c-32.484,14.606) -31.946,14.606 ; v1@-32.078,10.044 ccw(c-32.398,10.363) -31.946,10.363 ; v1@-32.078,10.044 ccw(c-32.398,10.363) -31.946,10.363 ; v1@-32.078,10.044 ccw(c-32.398,10.363) -31.946,10.363 ; -31.946,10.486 ccw(c-31.321,10.486) v1@-31.763,10.044 ; -31.946,10.486 ccw(c-31.321,10.486) v1@-31.763,10.044 ; -31.946,10.486 ccw(c-31.321,10.486) v1@-31.763,10.044 ; -31.946,14.606 cw(c-31.408,14.606) v1@-31.788,14.986 ; -31.946,14.606 cw(c-31.408,14.606) v1@-31.788,14.986 ; -31.946,14.606 cw(c-31.408,14.606) v1@-31.788,14.986
  Bottom Layer w0.254: K1.4@-32.569,8.36 -32.098,8.83 -32.098,9.48 -31.921,9.658 v1(-31.921,9.886) ; v1(-31.946,15.144) -31.946,15.627 ; -30.666,19.513 -30.93,19.513 ; -30.579,19.513 cw(c-30.579,19.211) D5.1@-30.366,19.424 ; R39.1@-29.795,17.938 -30.208,18.351 D5.1@-30.208,19.462 ; K1.3@-32.939,17.429 ccw(c-33.831,18.322) -32.569,18.322 ; K1.3@-32.939,17.429 ccw(c-33.831,18.322) -32.569,18.322 ; K1.3@-32.939,17.429 ccw(c-33.831,18.322) -32.569,18.322 ; -32.569,18.322 ccw(c-31.306,18.322) K1.3@-32.199,17.429 ; -32.569,18.322 ccw(c-31.306,18.322) K1.3@-32.199,17.429 ; -32.569,18.322 ccw(c-31.306,18.322) K1.3@-32.199,17.429 ; -32.051,15.732 ccw(c-32.546,15.237) -32.559,15.936 cw(c-32.546,15.237) -32.051,15.732 ; -32.051,15.732 cw(c-31.775,16.008) -32.114,16.201 ccw(c-31.775,16.008) -32.051,15.732 ; -31.946,15.627 ccw(c-31.535,15.627) -31.801,15.314 cw(c-31.535,15.627) -31.946,15.627 ; -31.946,15.627 cw(c-32.357,15.627) -32.091,15.314 ccw(c-32.357,15.627) -31.946,15.627 ; -31.946,15.627 -32.569,16.249 K1.3@-32.569,16.759 -32.569,18.484 -31.54,19.513 -30.93,19.513 ; -30.93,19.513 -30.259,19.513 D5.1@-30.208,19.462 ; -30.208,18.449 ccw(c-29.432,18.449) R39.1@-29.897,17.827 ; -30.208,18.449 ccw(c-29.432,18.449) R39.1@-29.897,17.827 ; -30.208,18.449 ccw(c-29.432,18.449) R39.1@-29.897,17.827 ; -30.208,18.955 ccw(c-29.054,18.955) R39.1@-29.745,18.03 ; -30.208,18.955 ccw(c-29.054,18.955) R39.1@-29.745,18.03 ; -30.208,18.955 ccw(c-29.054,18.955) R39.1@-29.745,18.03 ; D5.1@-30.208,19.462 ccw(c-28.676,19.462) R39.1@-29.593,18.234 ; D5.1@-30.208,19.462 ccw(c-28.676,19.462) R39.1@-29.593,18.234 ; D5.1@-30.208,19.462 ccw(c-28.676,19.462) R39.1@-29.593,18.234 ; K1.4@-32.098,8.919 cw(c-30.953,8.919) -31.763,9.728 ccw(c-30.953,8.919) K1.4@-32.098,8.919 ; -32.098,9.443 cw(c-31.876,9.443) -31.898,9.664 ccw(c-31.876,9.443) -32.098,9.443 ; -32.098,9.532 cw(c-31.566,9.532) -31.943,9.908 ccw(c-31.566,9.532) -32.098,9.532
NetL4_2: L4.2 U5.2 | length 18.4
  Top Layer w0.508: U5.2@-20.47,29.495 -19.754,29.495 -19.221,28.962 ; L4.2@-19.674,27.88 ccw(c-20.738,28.961) -19.221,28.961 ; L4.2@-19.221,27.42 L4.2@-19.221,27.572 ; L4.2@-19.068,27.42 L4.2@-19.221,27.572 ; L4.2@-18.768,27.88 cw(c-17.704,28.961) -19.221,28.961 ; U5.2@-20.238,29.452 cw(c-20.238,28.18) -19.338,29.079 ; U5.2@-20.238,29.452 cw(c-20.238,28.18) -19.338,29.079 ; U5.2@-20.238,29.452 cw(c-20.238,28.18) -19.338,29.079 ; U5.2@-20.227,29.453 cw(c-20.046,28.722) -19.514,29.254 ; U5.2@-20.227,29.453 cw(c-20.046,28.722) -19.514,29.254 ; U5.2@-20.227,29.453 cw(c-20.046,28.722) -19.514,29.254 ; L4.2@-19.615,28.16 ccw(c-20.232,28.962) -19.221,28.962 ; L4.2@-19.615,28.16 ccw(c-20.232,28.962) -19.221,28.962 ; L4.2@-19.615,28.16 ccw(c-20.232,28.962) -19.221,28.962 ; L4.2@-19.615,28.16 ccw(c-20.232,28.962) -19.221,28.962 ; L4.2@-19.221,27.572 -19.221,28.962 ; -19.221,28.962 ccw(c-18.209,28.962) L4.2@-18.826,28.16 ; -19.221,28.962 ccw(c-18.209,28.962) L4.2@-18.826,28.16 ; -19.221,28.962 ccw(c-18.209,28.962) L4.2@-18.826,28.16 ; -19.221,28.962 ccw(c-18.209,28.962) L4.2@-18.826,28.16
NetLED1_2: LED1.2 R8.1 | length 13
  Top Layer w0.203: LED1.2@-48.166,3.847 -48.166,4.716 -47.562,5.319 -42.101,5.319 -41.75,5.67 -38.626,5.67 -37.813,6.483 -37.813,7.465 R8.1@-37.839,7.491
NetLED1_3: LED1.3 R11.1 | length 15.9
  Top Layer w0.203: LED1.3@-45.065,2.447 -46.326,2.447 -46.551,2.673 -46.551,4.451 -46.246,4.755 -40.277,4.755 -40.023,5.009 -37.153,5.009 -36.086,6.076 R11.1@-36.086,7.491
NetLED1_4: LED1.4 R14.1 | length 12.7
  Top Layer w0.203: LED1.4@-45.065,3.847 -37.121,3.847 -34.461,6.508 R14.1@-34.461,7.491
NetLED2_2: LED2.2 LED2.4 R18.2 | length 7.9
  Top Layer w0.254: LED2.4@-21.868,2.622 -20.872,2.622 -20.549,2.944 -20.549,3.663 ; LED2.2@-21.868,3.622 -20.591,3.622 -20.549,3.663 ; R18.2@-19.483,5.035 -20.549,3.968 -20.549,3.663 ; -20.102,4.415 cw(c-19.483,3.795) -19.483,4.672 ccw(c-19.483,3.795) -20.102,4.415 ; -20.042,4.475 ccw(c-20.576,5.01) -19.821,5.01 cw(c-20.576,5.01) -20.042,4.475
NetQ1_1: Q1.1 R6.2 R7.1 | length 32.2
  Top Layer w0.203: Q1.1@-26.954,9.147 cw(c-27.329,8.772) -26.798,8.772 ; Q1.1@-26.813,9.523 -26.798,9.507 -26.798,7.93 R6.2@-26.747,7.88 -26.798,7.829 R7.1@-26.798,5.975 ; -26.798,8.846 cw(c-26.372,8.846) Q1.1@-26.673,9.147 ; R7.1@-27.055,6.257 ccw(c-27.675,6.877) -26.798,6.877 ; R7.1@-27.055,6.257 ccw(c-27.675,6.877) -26.798,6.877 ; R7.1@-27.055,6.257 ccw(c-27.675,6.877) -26.798,6.877 ; Q1.1@-27.055,9.147 cw(c-27.676,8.526) -26.798,8.526 ; Q1.1@-27.055,9.147 cw(c-27.676,8.526) -26.798,8.526 ; Q1.1@-27.055,9.147 cw(c-27.676,8.526) -26.798,8.526 ; Q1.1@-27.055,9.147 cw(c-27.676,8.526) -26.798,8.526 ; R6.2@-27.004,7.598 cw(c-27.502,7.1) -26.798,7.1 ; R6.2@-27.004,7.598 cw(c-27.502,7.1) -26.798,7.1 ; R6.2@-27.004,7.598 cw(c-27.502,7.1) -26.798,7.1 ; R6.2@-27.004,7.598 cw(c-27.502,7.1) -26.798,7.1 ; R6.2@-27.004,7.598 cw(c-27.502,7.1) -26.798,7.1 ; R6.2@-27.004,8.162 ccw(c-27.502,8.659) -26.798,8.659 ; R6.2@-27.004,8.162 ccw(c-27.502,8.659) -26.798,8.659 ; R6.2@-27.004,8.162 ccw(c-27.502,8.659) -26.798,8.659 ; R6.2@-27.004,8.162 ccw(c-27.502,8.659) -26.798,8.659 ; R6.2@-27.004,8.162 ccw(c-27.502,8.659) -26.798,8.659 ; -26.798,6.855 cw(c-25.747,6.855) R6.2@-26.49,7.598 ; -26.798,6.855 cw(c-25.747,6.855) R6.2@-26.49,7.598 ; -26.798,6.855 cw(c-25.747,6.855) R6.2@-26.49,7.598 ; -26.798,6.855 cw(c-25.747,6.855) R6.2@-26.49,7.598 ; -26.798,6.855 cw(c-25.747,6.855) R6.2@-26.49,7.598 ; -26.798,6.877 ccw(c-25.92,6.877) R7.1@-26.541,6.257 ; -26.798,6.877 ccw(c-25.92,6.877) R7.1@-26.541,6.257 ; -26.798,6.877 ccw(c-25.92,6.877) R7.1@-26.541,6.257 ; -26.798,7.345 cw(c-26.238,7.345) R6.2@-26.634,7.741 ; -26.798,7.345 cw(c-26.238,7.345) R6.2@-26.634,7.741 ; -26.798,7.345 cw(c-26.238,7.345) R6.2@-26.634,7.741 ; -26.798,7.345 cw(c-26.238,7.345) R6.2@-26.634,7.741 ; -26.798,7.345 cw(c-26.238,7.345) R6.2@-26.634,7.741 ; -26.798,8.414 ccw(c-26.238,8.414) R6.2@-26.634,8.018 ; -26.798,8.414 ccw(c-26.238,8.414) R6.2@-26.634,8.018 ; -26.798,8.414 ccw(c-26.238,8.414) R6.2@-26.634,8.018 ; -26.798,8.414 ccw(c-26.238,8.414) R6.2@-26.634,8.018 ; -26.798,8.414 ccw(c-26.238,8.414) R6.2@-26.634,8.018 ; -26.798,8.904 ccw(c-25.747,8.904) R6.2@-26.49,8.162 ; -26.798,8.904 ccw(c-25.747,8.904) R6.2@-26.49,8.162 ; -26.798,8.904 ccw(c-25.747,8.904) R6.2@-26.49,8.162 ; -26.798,8.904 ccw(c-25.747,8.904) R6.2@-26.49,8.162 ; -26.798,8.904 ccw(c-25.747,8.904) R6.2@-26.49,8.162 ; R7.1@-27.029,6.358 ccw(c-27.588,6.917) -26.798,6.917 cw(c-27.588,6.917) R7.1@-27.029,6.358 ; -26.798,7.04 ccw(c-25.834,7.04) -26.515,6.358 cw(c-25.834,7.04) -26.798,7.04
NetQ1_3: Q1.3 R12.1 | length 17.1
  Top Layer w0.203: R12.1@-28.915,11.512 R12.1@-28.877,11.55 ; R12.1@-28.915,11.588 -28.511,11.993 -27.374,11.993 ; -27.571,11.993 -27.374,11.993 ; Q1.3@-25.863,11.993 Q1.3@-25.965,11.993 -27.374,11.993 ; R12.1@-28.837,11.892 ccw(c-28.737,12.342) -28.411,12.016 ; R12.1@-28.837,11.892 ccw(c-28.737,12.342) -28.411,12.016 ; R12.1@-28.837,11.892 ccw(c-28.737,12.342) -28.411,12.016 ; R12.1@-28.837,11.892 ccw(c-28.737,12.342) -28.411,12.016 ; R12.1@-28.837,11.892 ccw(c-28.737,12.342) -28.411,12.016 ; R12.1@-28.837,11.892 ccw(c-28.737,12.342) -28.411,12.016 ; R12.1@-28.793,11.93 ccw(c-28.67,12.275) -28.411,12.016 ; R12.1@-28.793,11.93 ccw(c-28.67,12.275) -28.411,12.016 ; R12.1@-28.793,11.93 ccw(c-28.67,12.275) -28.411,12.016 ; R12.1@-28.793,11.93 ccw(c-28.67,12.275) -28.411,12.016 ; R12.1@-28.793,11.93 ccw(c-28.67,12.275) -28.411,12.016 ; R12.1@-28.793,11.93 ccw(c-28.67,12.275) -28.411,12.016 ; R12.1@-28.555,11.587 cw(c-28.052,11.656) -28.411,12.016 ; R12.1@-28.555,11.587 cw(c-28.052,11.656) -28.411,12.016 ; R12.1@-28.555,11.587 cw(c-28.052,11.656) -28.411,12.016 ; R12.1@-28.555,11.587 cw(c-28.052,11.656) -28.411,12.016 ; R12.1@-28.555,11.587 cw(c-28.052,11.656) -28.411,12.016 ; R12.1@-28.555,11.587 cw(c-28.052,11.656) -28.411,12.016 ; R12.1@-28.554,11.621 cw(c-28.063,11.667) -28.411,12.016 ; R12.1@-28.554,11.621 cw(c-28.063,11.667) -28.411,12.016 ; R12.1@-28.554,11.621 cw(c-28.063,11.667) -28.411,12.016 ; R12.1@-28.554,11.621 cw(c-28.063,11.667) -28.411,12.016 ; R12.1@-28.554,11.621 cw(c-28.063,11.667) -28.411,12.016 ; R12.1@-28.554,11.621 cw(c-28.063,11.667) -28.411,12.016 ; -26.444,11.993 cw(c-26.444,11.514) Q1.3@-26.105,11.852 ; -26.444,11.993 ccw(c-26.444,12.472) Q1.3@-26.105,12.133 ; -26.444,11.993 cw(c-26.444,11.514) Q1.3@-26.105,11.852 ; -26.444,11.993 ccw(c-26.444,12.472) Q1.3@-26.105,12.133 ; -26.444,11.993 ccw(c-26.444,12.472) Q1.3@-26.105,12.133 ; -26.444,11.993 cw(c-26.444,11.514) Q1.3@-26.105,11.852 ; -26.444,11.993 ccw(c-26.444,12.472) Q1.3@-26.105,12.133 ; -26.444,11.993 cw(c-26.444,11.514) Q1.3@-26.105,11.852
NetQ2_1: Q2.1 R10.1 R13.2 | length 33.5
  Top Layer w0.203: R10.1@-28.941,13.239 -27.603,13.239 -27.323,12.96 -25.266,12.96 -24.428,12.121 -24.428,11.563 -23.589,10.724 -21.852,10.724 ; R13.2@-21.705,9.787 ccw(c-22.264,10.346) -21.473,10.346 -21.852,10.724 ; R13.2@-21.473,9.505 -21.473,7.862 Q2.1@-21.242,7.631 ; R13.2@-21.448,9.505 -21.448,10.321 ; -21.852,10.724 -21.448,10.321 ; R13.2@-21.705,9.223 cw(c-22.264,8.664) -21.473,8.664 ; R13.2@-21.705,9.223 cw(c-22.264,8.664) -21.473,8.664 ; R13.2@-21.705,9.223 cw(c-22.264,8.664) -21.473,8.664 ; R13.2@-21.705,9.223 cw(c-22.264,8.664) -21.473,8.664 ; R13.2@-21.705,9.223 cw(c-22.264,8.664) -21.473,8.664 ; R13.2@-21.684,9.806 ccw(c-22.126,10.321) -21.448,10.321 ; R13.2@-21.684,9.806 ccw(c-22.126,10.321) -21.448,10.321 ; R13.2@-21.684,9.806 ccw(c-22.126,10.321) -21.448,10.321 ; R13.2@-21.684,9.806 ccw(c-22.126,10.321) -21.448,10.321 ; -21.473,8.541 cw(c-20.509,8.541) R13.2@-21.191,9.223 ; -21.473,8.541 cw(c-20.509,8.541) R13.2@-21.191,9.223 ; -21.473,8.541 cw(c-20.509,8.541) R13.2@-21.191,9.223 ; -21.473,8.541 cw(c-20.509,8.541) R13.2@-21.191,9.223 ; -21.473,8.541 cw(c-20.509,8.541) R13.2@-21.191,9.223 ; -21.473,8.572 ccw(c-20.576,8.572) Q2.1@-21.21,7.938 ; -21.473,8.572 ccw(c-20.576,8.572) Q2.1@-21.21,7.938 ; -21.473,8.572 ccw(c-20.576,8.572) Q2.1@-21.21,7.938 ; -21.473,8.572 ccw(c-20.576,8.572) Q2.1@-21.21,7.938 ; -21.473,8.572 ccw(c-20.576,8.572) Q2.1@-21.21,7.938 ; R13.2@-21.473,9.063 ccw(c-20.085,9.063) Q2.1@-21.067,8.082 ; R13.2@-21.473,9.063 ccw(c-20.085,9.063) Q2.1@-21.067,8.082 ; R13.2@-21.473,9.063 ccw(c-20.085,9.063) Q2.1@-21.067,8.082 ; R13.2@-21.473,9.063 ccw(c-20.085,9.063) Q2.1@-21.067,8.082 ; R13.2@-21.473,9.063 ccw(c-20.085,9.063) Q2.1@-21.067,8.082 ; -21.448,10.321 ccw(c-20.77,10.321) R13.2@-21.211,9.806 ; -21.448,10.321 ccw(c-20.77,10.321) R13.2@-21.211,9.806 ; -21.448,10.321 ccw(c-20.77,10.321) R13.2@-21.211,9.806 ; -21.448,10.321 ccw(c-20.77,10.321) R13.2@-21.211,9.806
NetQ2_3: Q2.3 R7.2 | length 14.8
  Top Layer w0.203: R7.2@-25.111,6.122 -25.258,5.975 -24.414,5.131 Q2.3@-22.192,5.131 ; -22.792,5.131 cw(c-22.792,4.531) Q2.3@-22.368,4.955 ; -22.792,5.131 ccw(c-22.792,5.731) Q2.3@-22.368,5.307 ; -22.792,5.131 cw(c-22.792,4.531) Q2.3@-22.368,4.955 ; -22.792,5.131 ccw(c-22.792,5.731) Q2.3@-22.368,5.307 ; -22.792,5.131 ccw(c-22.792,5.731) Q2.3@-22.368,5.307 ; -22.792,5.131 cw(c-22.792,4.531) Q2.3@-22.368,4.955 ; -22.792,5.131 ccw(c-22.792,5.731) Q2.3@-22.368,5.307 ; -22.792,5.131 cw(c-22.792,4.531) Q2.3@-22.368,4.955 ; -22.792,5.131 ccw(c-22.792,5.731) Q2.3@-22.368,5.307 ; -22.792,5.131 cw(c-22.792,4.531) Q2.3@-22.368,4.955 ; -25.258,5.586 cw(c-25.258,4.648) -24.595,5.312 ccw(c-25.258,4.648) -25.258,5.586 ; R7.2@-25.232,5.688 cw(c-25.232,5.057) -24.786,5.503 ccw(c-25.232,5.057) R7.2@-25.232,5.688 ; R7.2@-25.072,6.051 ccw(c-24.439,6.051) -24.887,5.604 cw(c-24.439,6.051) R7.2@-25.072,6.051 ; R7.2@-24.894,5.95 ccw(c-24.077,5.95) -24.655,5.372 cw(c-24.077,5.95) R7.2@-24.894,5.95 ; R7.2@-24.869,6.051 ccw(c-23.745,6.051) -24.54,5.257 cw(c-23.745,6.051) R7.2@-24.869,6.051
NetQ3_1: Q3.1 R19.1 R20.2 | length 23.8
  Bottom Layer w0.381: R19.1@-49.82,26.549 -49.82,29.7 Q3.1@-49.525,29.995 ; Q3.1@-49.6,29.683 ccw(c-49.069,29.152) -49.82,29.152 ; R19.1@-50.014,26.768 ccw(c-50.482,27.236) -49.82,27.236 ; R19.1@-50.014,26.768 ccw(c-50.482,27.236) -49.82,27.236 ; R19.1@-50.014,26.768 ccw(c-50.482,27.236) -49.82,27.236 ; R19.1@-50.014,26.768 ccw(c-50.482,27.236) -49.82,27.236 ; R19.1@-50.014,26.768 ccw(c-50.482,27.236) -49.82,27.236 ; R20.2@-49.988,28.184 cw(c-50.395,27.777) -49.82,27.777 ; R20.2@-49.988,28.184 cw(c-50.395,27.777) -49.82,27.777 ; R20.2@-49.988,28.184 cw(c-50.395,27.777) -49.82,27.777 ; R20.2@-49.988,28.184 cw(c-50.395,27.777) -49.82,27.777 ; R20.2@-49.988,28.184 cw(c-50.395,27.777) -49.82,27.777 ; R20.2@-49.988,28.622 ccw(c-50.395,29.029) -49.82,29.029 ; R20.2@-49.988,28.622 ccw(c-50.395,29.029) -49.82,29.029 ; R20.2@-49.988,28.622 ccw(c-50.395,29.029) -49.82,29.029 ; R20.2@-49.988,28.622 ccw(c-50.395,29.029) -49.82,29.029 ; R20.2@-49.988,28.622 ccw(c-50.395,29.029) -49.82,29.029 ; -49.82,27.236 ccw(c-49.157,27.236) R19.1@-49.626,26.768 ; -49.82,27.236 ccw(c-49.157,27.236) R19.1@-49.626,26.768 ; -49.82,27.236 ccw(c-49.157,27.236) R19.1@-49.626,26.768 ; -49.82,27.236 ccw(c-49.157,27.236) R19.1@-49.626,26.768 ; -49.82,27.236 ccw(c-49.157,27.236) R19.1@-49.626,26.768 ; -49.82,27.654 cw(c-49.07,27.654) R20.2@-49.6,28.184 ; -49.82,27.654 cw(c-49.07,27.654) R20.2@-49.6,28.184 ; -49.82,27.654 cw(c-49.07,27.654) R20.2@-49.6,28.184 ; -49.82,27.654 cw(c-49.07,27.654) R20.2@-49.6,28.184 ; -49.82,27.654 cw(c-49.07,27.654) R20.2@-49.6,28.184 ; R20.2@-49.82,28.784 cw(c-48.549,28.784) Q3.1@-49.447,29.683 ; R20.2@-49.82,28.784 cw(c-48.549,28.784) Q3.1@-49.447,29.683 ; R20.2@-49.82,28.784 cw(c-48.549,28.784) Q3.1@-49.447,29.683 ; R20.2@-49.82,28.784 cw(c-48.549,28.784) Q3.1@-49.447,29.683 ; -49.82,29.152 ccw(c-49.07,29.152) R20.2@-49.6,28.622 ; -49.82,29.152 ccw(c-49.07,29.152) R20.2@-49.6,28.622 ; -49.82,29.152 ccw(c-49.07,29.152) R20.2@-49.6,28.622 ; -49.82,29.152 ccw(c-49.07,29.152) R20.2@-49.6,28.622 ; -49.82,29.152 ccw(c-49.07,29.152) R20.2@-49.6,28.622